# Altium PCB Flip.PcbDoc
Units mil, origin at the board's own origin, x right, y up, seen from the top; angles counter-clockwise.
Board outline 1094.88 x 2000 mil, 4 copper layers (Top Layer, GND, PWR, Bottom Layer), stack 23.756 mil thick; 95 components, 90 nets, 410 pads, 177 vias.
Unrouted connection lines stored in the file: 4.
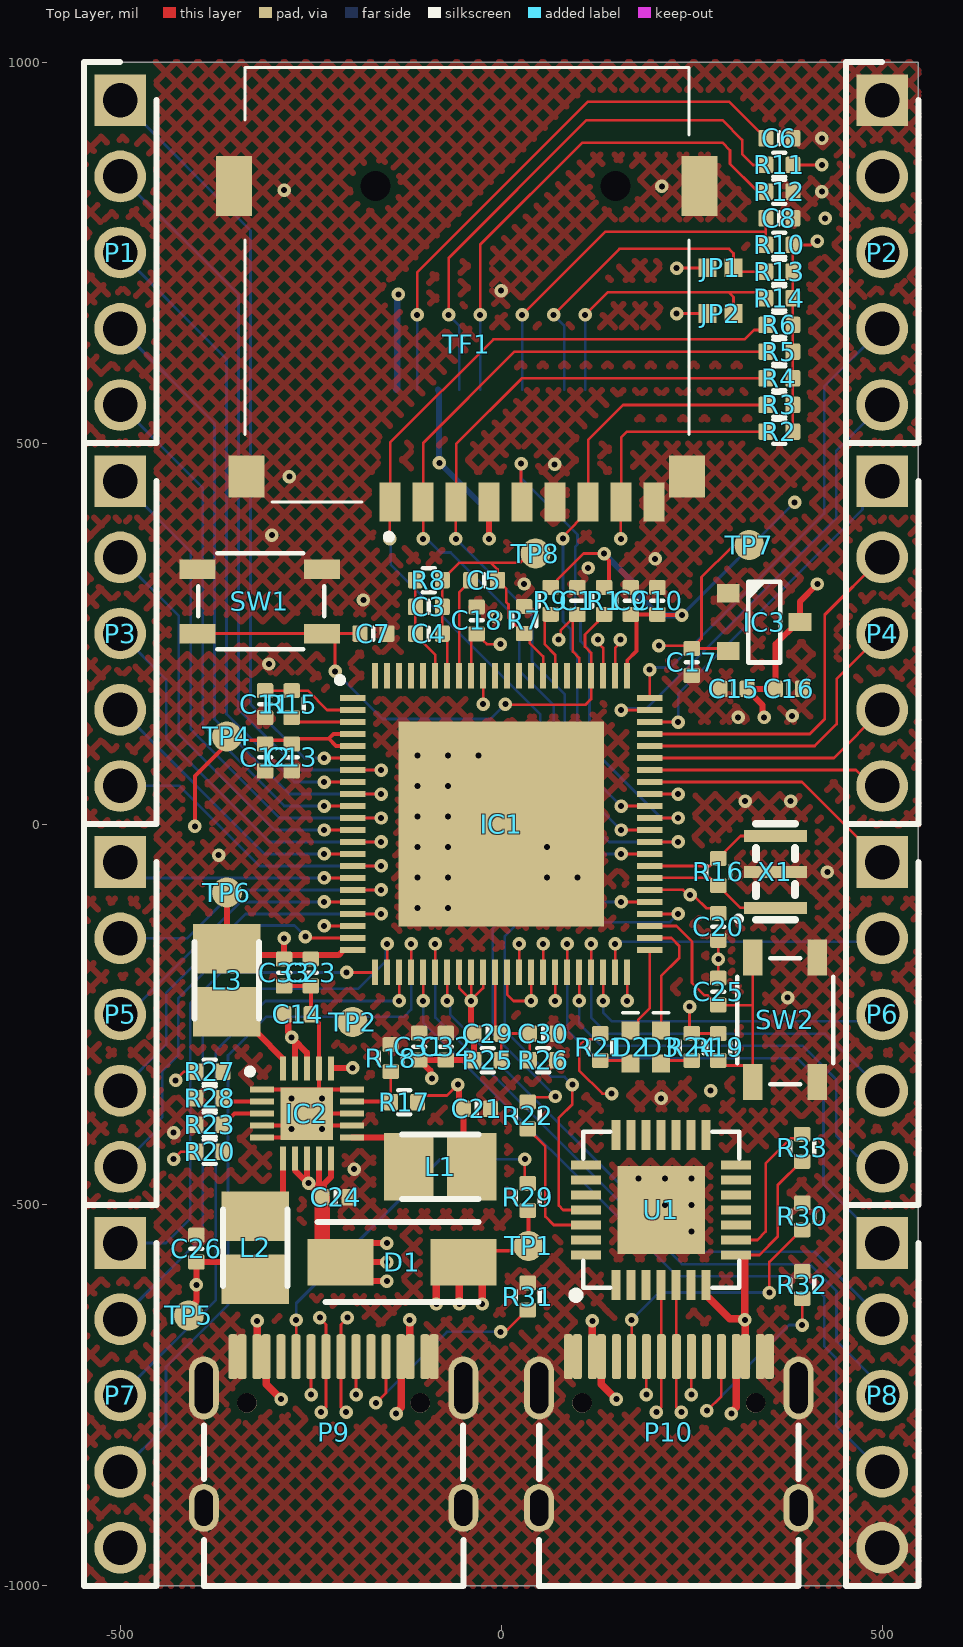
[diagram p0: Top Layer view]
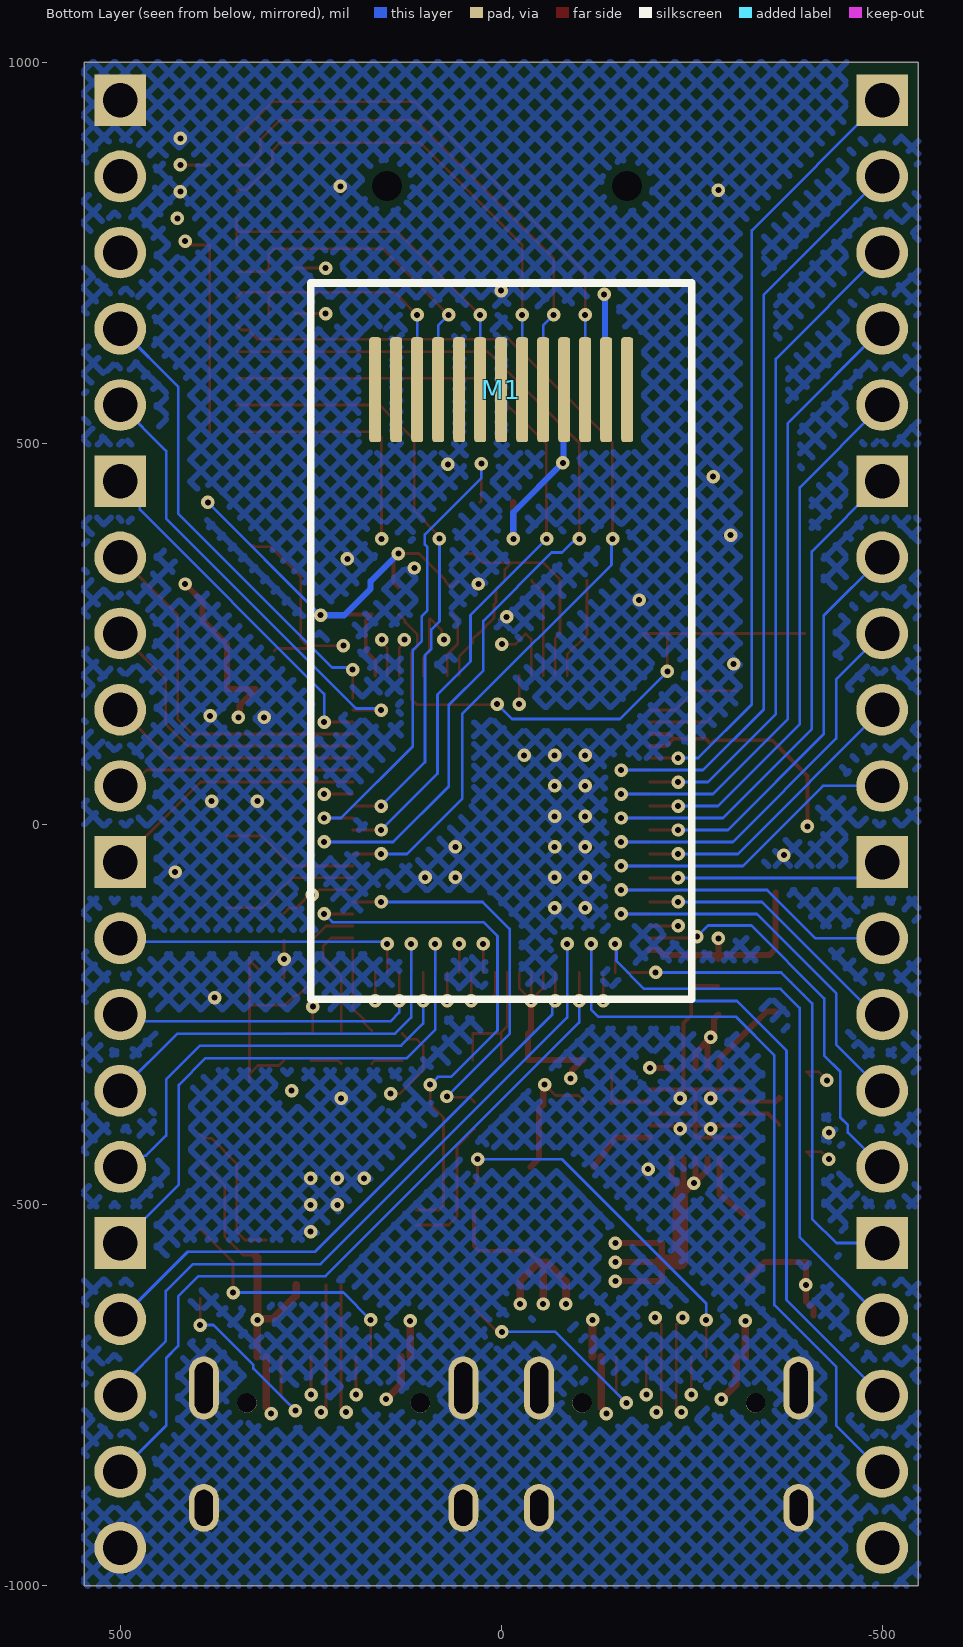
[diagram p1: Bottom Layer view, seen from below]
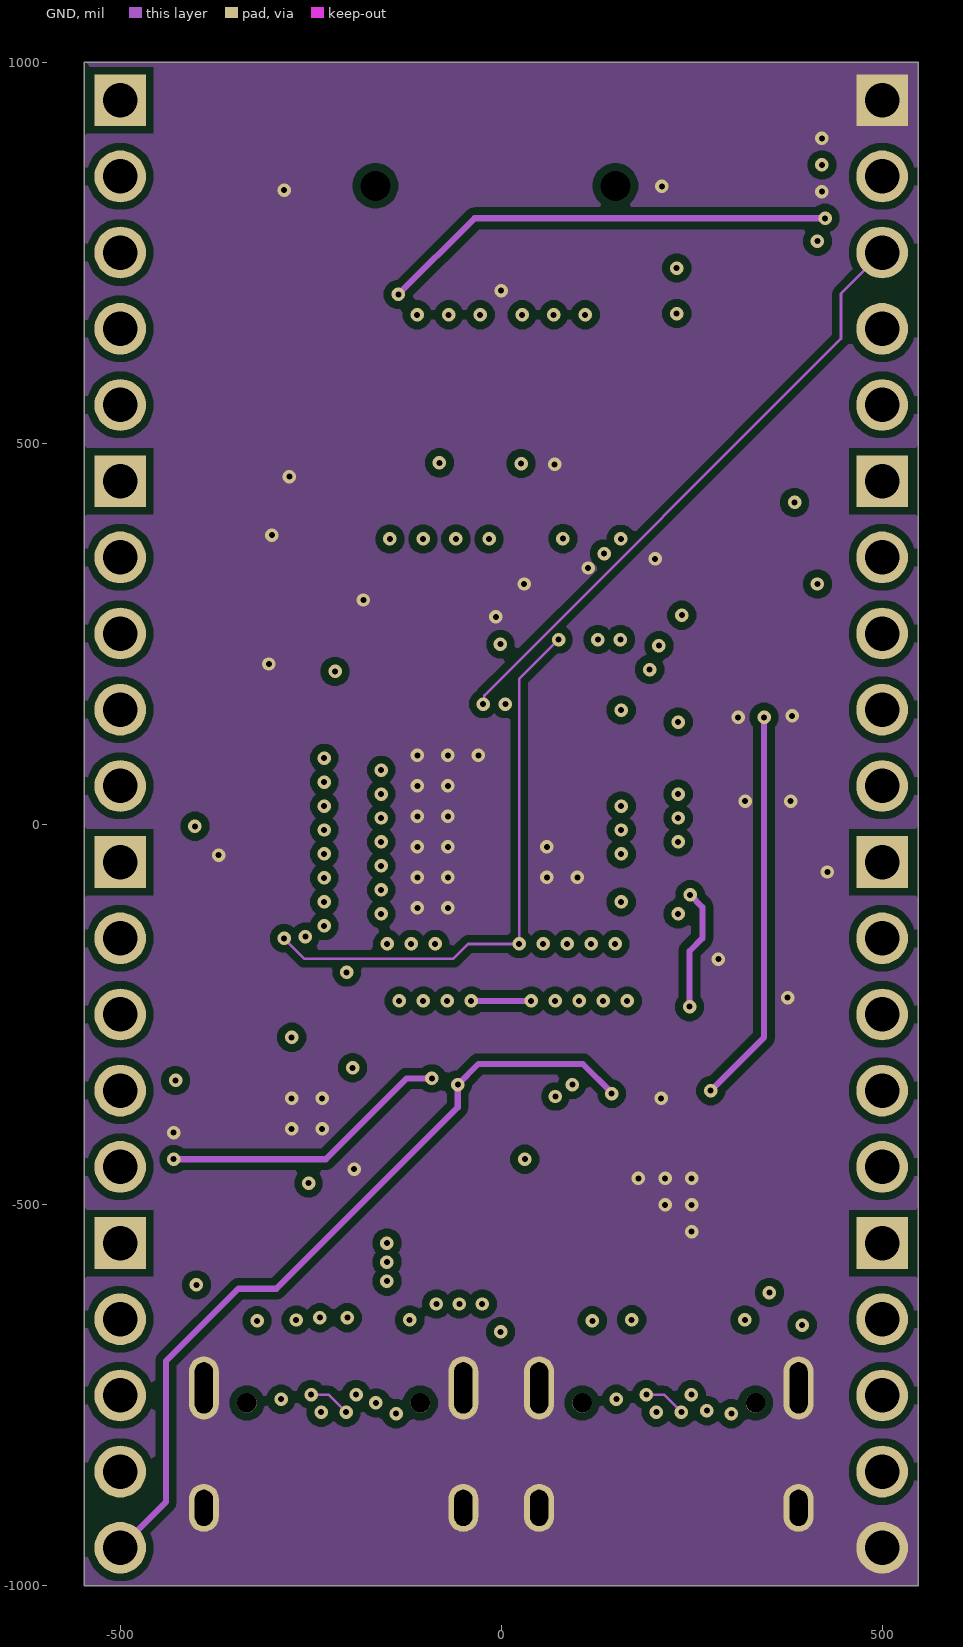
[diagram p2: GND]
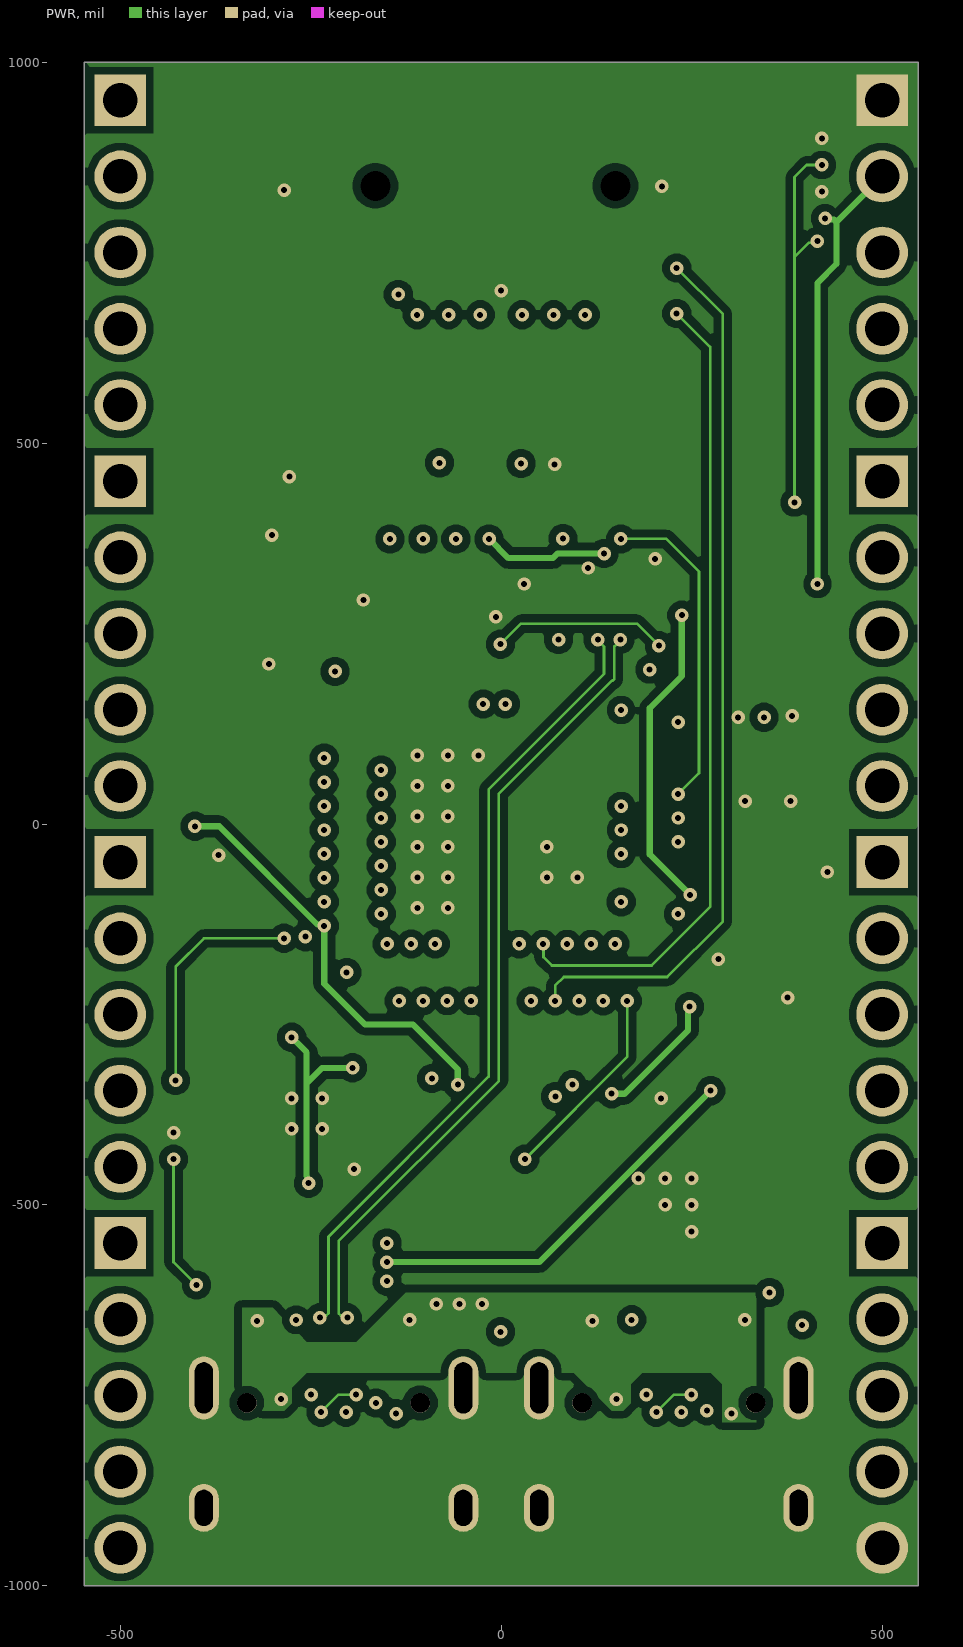
[diagram p3: PWR]
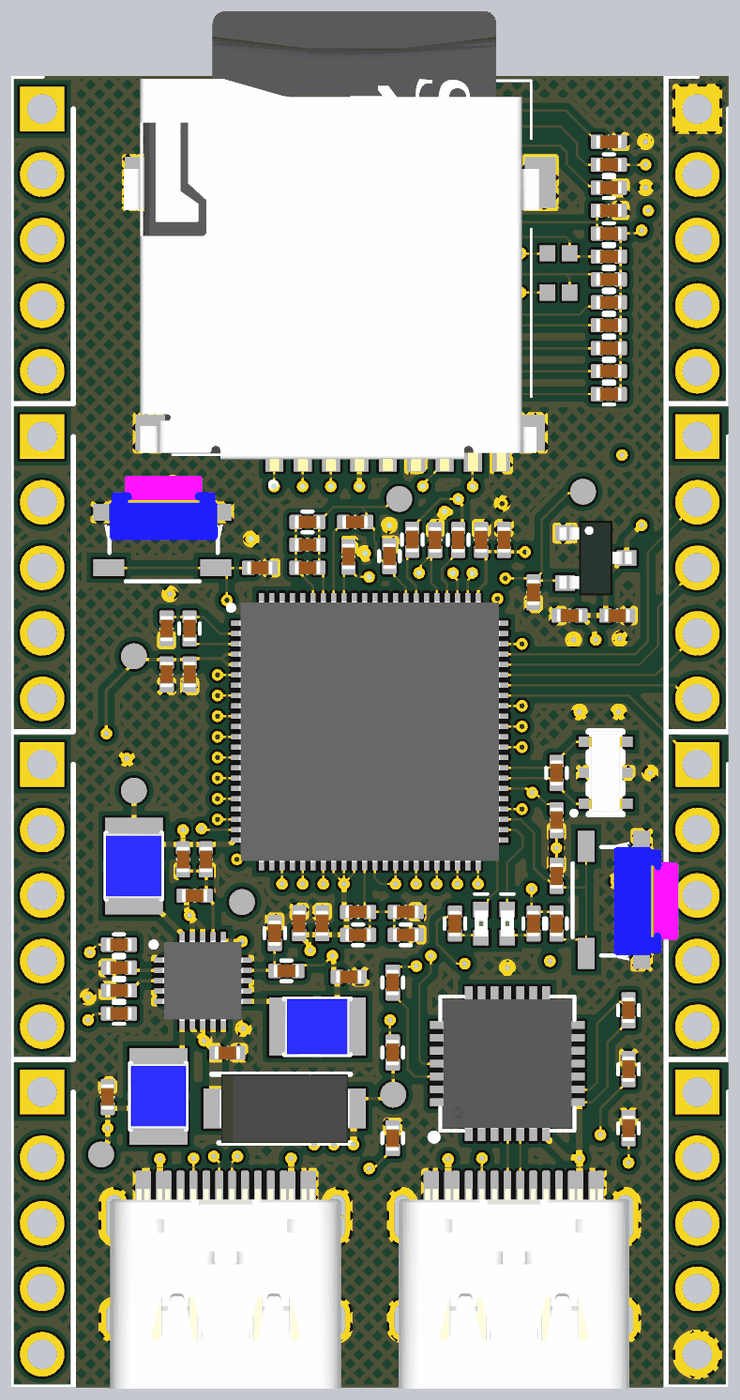
[diagram p4: 3D render of the assembled board from above, using the file's embedded part models]

## Layer stack, top to bottom
Top Solder: solder mask 0.4, Solder Resist, Dk 3.5
Top Layer: signal copper 1.4
Dielectric 2: prepreg 2.8, PP-006, Dk 4.1
GND: signal copper 1.378
Dielectric 1: dielectric 12.6, FR-4, Dk 4.8
PWR: signal copper 1.378
Dielectric 3: prepreg 2.8, PP-006, Dk 4.1
Bottom Layer: signal copper 1.4
Bottom Solder: solder mask 0.4, Solder Resist, Dk 3.5

## Board outline
-547.44,-1000 547.44,-1000 547.44,1000 -547.44,1000

## Design rules (kind name [scope] priority, off if disabled: settings)
Clearance [All] p1: gap=0 ignorepadtopadclearanceinfootprint=TRUE except(10: Arc-Fill Arc-Poly Arc-Region Track-Fill Track-Poly Track-Region SMDPad-Fill SMDPad-Poly SMDPad-Region THPad-Fill THPad-Poly THPad-Region Via-Fill Via-Poly Via-Region Fill-Fill Fill-Poly Fill-Region Poly-Poly Poly-Region Region-Region)
DiffPairsRouting [All] p1: maxlimit=10 minlimit=10 mostfreqgap=10 toplayer_minwidth=3.5 toplayer_maxwidth=15 toplayer_prefwidth=3.5 midlayer1_minwidth=3.5 midlayer1_maxwidth=15 midlayer1_prefwidth=3.5 midlayer2_minwidth=3.5 midlayer2_maxwidth=15 midlayer2_prefwidth=3.5 bottomlayer_minwidth=3.5 bottomlayer_maxwidth=15 bottomlayer_prefwidth=3.5 maxuncoupledlength=500
PolygonConnect [All] p1: connectstyle=Direct reliefconductorwidth=10 reliefentries=4 polygonreliefangle="90 Angle" airgapwidth=10
RoutingVias [All] p1: holewidth=7.87 width=17.72 viastyle="Through Hole" minholewidth=7.87 minwidth=17.72 maxholewidth=7.87 maxwidth=17.72
SolderMaskExpansion [All] p1: expansion=4 istentingtop=FALSE
Width [All] p1: maxlimit=100 minlimit=3.5 preferedwidth=3.5
29 further rules are at their usual default settings.

## Classes and differential pairs
differential pair USB: +USB_P -USB_N
differential pair USB_CP: +USB_CP_P -USB_CP_N

## Components (designator, comment, footprint, x,y, rotation, side; value= is the part's Value field where it differs from the comment)
C1 "100nF" CAP-0402 100,292.72 r270 top
C3 "100nF" CAP-0402 -95,285 r180 top
C4 "10uF" CAP-0402 -95,250 r0 top
C5 "1uF" CAP-0402 -22.28,320 r180 top
C6 "10uF" CAP-0402 365,900 r0 top
C7 "100nF" CAP-0402 -167.72,250 r180 top
C8 "10uF" CAP-0402 365,795 r0 top
C9 "100nF" CAP-0402 170,292.72 r90 top
C10 "10uF" CAP-0402 205,292.72 r270 top
C11 "1uF" CAP-0402 -310,157.28 r90 top
C12 "10uF" CAP-0402 -310,87.28 r90 top
C13 "100nF" CAP-0402 -275,87.28 r90 top
C14 "100nF" CAP-0402 -267.28,-250 r180 top
C15 "10uF" CAP-0402 305,177.28 r0 top
C16 "1uF" CAP-0402 377.72,177.28 r0 top
C17 "10uF" CAP-0402 250,212.6 r90 top
C18 "1uF" CAP-0402 -32.38,267.21 r90 top
C20 "10uF" CAP-0402 285,-135 r90 top
C21 "10uF" CAP-0402 -32,-374 r180 top
C23 "100nF" CAP-0402 -250,-195 r90 top
C24 "10uF" CAP-0402 -217.28,-490 r180 top
C25 "100nF" CAP-0402 285,-220 r270 top
C26 "10uF" CAP-0402 -400,-557.28 r270 top
C29 "100nF" CAP-0402 -17.72,-275 r0 top
C30 "100nF" CAP-0402 55,-275 r0 top
C31 "10uF" CAP-0402 -107.72,-292.28 r270 top
C32 "100nF" CAP-0402 -72.72,-292.28 r270 top
C33 "10uF" CAP-0402 -285,-195 r90 top
D1 "SS34" DO-214AC/SMA -130,-575 r0 top
D2 "RED" LED-0402 170,-292.72 r90 top
D3 "RED" LED-0402 210,-292.72 r90 top
IC1 "F1C200S" QFN88P_10X10mm 0,0 r0 top locked
IC2 "EA3036C" QFN3mmx3mm-20 -255,-380 r0 top
IC3 "XC6206P302MR-G" SOT-23-3 345,265 r180 top
JP1 "Select" 选择焊点-0402 288,730 r0 top
JP2 "Select" 选择焊点-0402 288,670 r0 top
L1 "2.2uH" L-1008 -80,-450 r0 top
L2 "2.2uH" L-1008 -322.72,-556.34 r270 top
L3 "2.2uH" L-1008 -360,-205 r90 top
M1 "OLED_12880" OLED_0.78INCH_12880 0,570 r90 bottom locked
P1 "HDR1x5" HDR1X5_2.54_180_BLANK -500,950 r270 top
P2 "HDR1x5" HDR1X5_2.54_180_BLANK 500,950 r270 top
P3 "HDR1x5" HDR1X5_2.54_180_BLANK -500,450 r270 top
P4 "HDR1x5" HDR1X5_2.54_180_BLANK 500,450 r270 top
P5 "HDR1x5" HDR1X5_2.54_180_BLANK -500,-50 r270 top
P6 "HDR1x5" HDR1X5_2.54_180_BLANK 500,-50 r270 top
P7 "HDR1x5" HDR1X5_2.54_180_BLANK -500,-550 r270 top
P8 "HDR1x5" HDR1X5_2.54_180_BLANK 500,-550 r270 top
P9 "TYPE-C-31-M-12" Type-C_16+4P -220,-798.36 r270 top locked
P10 "TYPE-C-31-M-12" Type-C_16+4P 220,-798.36 r270 top locked
R1 "10k" R-0402 135,292.72 r90 top
R2 "10k" R-0402 365,515 r0 top
R3 "10k" R-0402 365,550 r0 top
R4 "10k" R-0402 365,585 r0 top
R5 "10k" R-0402 365,620 r0 top
R6 "10k" R-0402 365,655 r0 top
R7 "0R" R-0402 30,267.72 r90 top
R8 "10k" R-0402 -95,320 r0 top
R9 "0R" R-0402 65,293 r90 top
R10 "10k" R-0402 365,760 r180 top
R11 "5.1k" R-0402 365,865 r180 top
R12 "560k" R-0402 365,830 r180 top
R13 "10k" R-0402 365,725 r180 top
R14 "10k" R-0402 365,690 r180 top
R15 "22R" R-0402 -275,157.28 r90 top
R16 "1M" R-0402 285,-62.99 r90 top
R17 "510k" R-0402 -127.28,-365 r0 top
R18 "110k" R-0402 -145,-307.28 r270 top
R19 "10k" R-0402 285,-292.72 r90 top
R20 "316k" R-0402 -382.72,-430 r180 top
R21 "5.1k" R-0402 130,-292.72 r270 top
R22 "200R" R-0402 35,-382.72 r270 top
R23 "100k" R-0402 -382.72,-395 r0 top
R24 "5.1k" R-0402 250,-292.72 r270 top
R25 "5.1k" R-0402 -17.72,-310 r0 top
R26 "5.1k" R-0402 55,-310 r0 top
R27 "100k" R-0402 -382.72,-325 r180 top
R28 "100k" R-0402 -382.72,-360 r0 top
R29 "56k" R-0402 35,-489.57 r90 top
R30 "5.1k" R-0402 395,-515 r90 top
R31 "5.1k" R-0402 35,-620.18 r90 top
R32 "5.1k" R-0402 395,-605 r90 top
R33 "10k" R-0402 395,-425 r270 top
SW1 "KEY" KEY-4P-4.2*3.4*2.5 -316.69,292.32 r180 top
SW2 "KEY" KEY-4P-4.2*3.4*2.5 372.68,-256.69 r90 top
TF1 "TF-01A" TF_1 -45,630 r90 top locked
TP1 "TestPoint" TestPoint 35.86,-553.74 r90 top
TP2 "TestPoint" TestPoint -195,-260 r90 top
TP4 "TestPoint" TestPoint -360,115 r90 top
TP5 "TestPoint" TestPoint -410,-645 r90 top
TP6 "TestPoint" TestPoint -360,-90 r90 top
TP7 "TestPoint" TestPoint 325.57,366.06 r90 top
TP8 "TestPoint" TestPoint 45,355 r90 top
U1 "CP2102" QFN28 210,-506.58 r90 top locked
X1 "24MHz" SMD3213-3P 360,-62.89 r90 top

## Footprints (in the part's own frame and the unit in brackets; to place one, negate y for a bottom-side part, rotate by r counter-clockwise, add the part's x,y. Pads: shape width x height; smd on the part's side, far side on the other; paste and mask are expansions set on the pad)
CAP-0402 [mm]
  rrect25% 0.5x0.55 smd: 1(-0.45,0) 2(0.45,0)
  silkscreen extent 0,-0.2 0,0.2, body extent -0.5,-0.25 0.5,0.25, height 0.6
DO-214AC/SMA [mm]
  rect 2.2x1.55 smd: 1(2.05,0) 2(-2.05,0)
  silkscreen extent -2.83,-1.33 2.55,1.33, body extent -2.55,-1.33 2.55,1.33, height 2.29
HDR1X5_2.54_180_BLANK [mm]
  rect 1.725x1.725 hole 1.15: 1(0,0)
  round 1.725 hole 1.15: 2(2.54,0) 3(5.08,0) 4(7.62,0) 5(10.16,0)
  silkscreen extent -1.27,-1.2 11.43,1.2
KEY-4P-4.2*3.4*2.5 [mm] "SKRPABE010"
  rect 1.2x0.65 smd: 1(-2.075,1.075) 1(2.075,1.075) 2(-2.075,-1.075) 2(2.075,-1.075)
  silkscreen extent -2.15,-1.6 2.05,1.6, body extent -2.35,-1.6 2.25,1.6, height 2.5
L-1008 [mm]
  rect 1.65x2.25 smd: 1(-1.05,0) 2(1.05,0)
  silkscreen extent -1.28,-1.07 1.28,1.07, body extent -1.28,-1.07 1.28,1.07, height 1.2
LED-0402 [mm]
  rect 0.6x0.6 smd: 1(-0.55,0) 2(0.55,0)
  silkscreen extent 1.14,-0.25 1.14,0.25, body extent -0.5,-0.25 0.5,0.25, height 0.5
OLED_0.78INCH_12880 [mm]
  rrect50% 3.5x0.4 smd: 1(0,-4.2) 2(0,-3.5) 3(0,-2.8) 4(0,-2.1) 5(0,-1.4) 6(0,-0.7) 7(0,0) 8(0,0.7) 9(0,1.4) 10(0,2.1) 11(0,2.8) 12(0,3.5) 13(0,4.2)
  silkscreen extent -20.32,-6.35 3.56,6.35, body extent -20.18,-6.25 7.54,6.25, height 1.55
QFN3mmx3mm-20 [mm]
  rect 0.8x0.2 smd: 1(-1.5,0.8) 2(-1.5,0.4) 3(-1.5,0) 4(-1.5,-0.4) 5(-1.5,-0.8) 11(1.5,-0.8) 12(1.5,-0.4) 13(1.5,0) 14(1.5,0.4) 15(1.5,0.8)
  rect 0.2x0.8 smd: 6(-0.8,-1.5) 7(-0.4,-1.5) 8(0,-1.5) 9(0.4,-1.5) 10(0.8,-1.5) 16(0.8,1.5) 17(0.4,1.5) 18(0,1.5) 19(-0.4,1.5) 20(-0.8,1.5)
  rect 1.75x1.75 smd: 21(0,0)
  silkscreen extent -2,1.3 -1.8,1.5, body extent -1.55,-1.55 1.55,1.55, height 0.8
QFN28 [mm]
  rect 1x0.3 smd: 1(-2.5,1.5) 2(-2.5,1) 3(-2.5,0.5) 4(-2.5,0) 5(-2.5,-0.5) 6(-2.5,-1) 7(-2.5,-1.5) 15(2.5,-1.5) 16(2.5,-1) 17(2.5,-0.5) 18(2.5,0) 19(2.5,0.5) 20(2.5,1) 21(2.5,1.5)
  rect 0.3x1 smd: 8(-1.5,-2.5) 9(-1,-2.5) 10(-0.5,-2.5) 11(0,-2.5) 12(0.5,-2.5) 13(1,-2.5) 14(1.5,-2.5) 22(1.5,2.5) 23(1,2.5) 24(0.5,2.5) 25(0,2.5) 26(-0.5,2.5) 27(-1,2.5) 28(-1.5,2.5)
  rect 2.921x2.921 smd paste-3.2: 29(0,0)
  silkscreen extent -2.97,-2.6 2.6,2.97, body extent -2.5,-2.5 2.5,2.5, height 1
QFN88P_10X10mm [mm]
  rect 0.85x0.2 smd: 1(-4.95,4.2) 2(-4.95,3.8) 3(-4.95,3.4) 4(-4.95,3) 5(-4.95,2.6) 6(-4.95,2.2) 7(-4.95,1.8) 8(-4.95,1.4) 9(-4.95,1) 10(-4.95,0.6) 11(-4.95,0.2) 12(-4.95,-0.2) 13(-4.95,-0.6) 14(-4.95,-1) 15(-4.95,-1.4) 16(-4.95,-1.8) 17(-4.95,-2.2) 18(-4.95,-2.6) 19(-4.95,-3) 20(-4.95,-3.4) 21(-4.95,-3.8) 22(-4.95,-4.2) 45(4.95,-4.2) 46(4.95,-3.8) 47(4.95,-3.4) 48(4.95,-3) 49(4.95,-2.6) 50(4.95,-2.2) 51(4.95,-1.8) 52(4.95,-1.4) 53(4.95,-1) 54(4.95,-0.6) 55(4.95,-0.2) 56(4.95,0.2) 57(4.95,0.6) 58(4.95,1) 59(4.95,1.4) 60(4.95,1.8) 61(4.95,2.2) 62(4.95,2.6) 63(4.95,3) 64(4.95,3.4) 65(4.95,3.8) 66(4.95,4.2)
  rect 0.2x0.85 smd: 23(-4.2,-4.95) 24(-3.8,-4.95) 25(-3.4,-4.95) 26(-3,-4.95) 27(-2.6,-4.95) 28(-2.2,-4.95) 29(-1.8,-4.95) 30(-1.4,-4.95) 31(-1,-4.95) 32(-0.6,-4.95) 33(-0.2,-4.95) 34(0.2,-4.95) 35(0.6,-4.95) 36(1,-4.95) 37(1.4,-4.95) 38(1.8,-4.95) 39(2.2,-4.95) 40(2.6,-4.95) 41(3,-4.95) 42(3.4,-4.95) 43(3.8,-4.95) 44(4.2,-4.95) 67(4.2,4.95) 68(3.8,4.95) 69(3.4,4.95) 70(3,4.95) 71(2.6,4.95) 72(2.2,4.95) 73(1.8,4.95) 74(1.4,4.95) 75(1,4.95) 76(0.6,4.95) 77(0.2,4.95) 78(-0.2,4.95) 79(-0.6,4.95) 80(-1,4.95) 81(-1.4,4.95) 82(-1.8,4.95) 83(-2.2,4.95) 84(-2.6,4.95) 85(-3,4.95) 86(-3.4,4.95) 87(-3.8,4.95) 88(-4.2,4.95)
  rect 6.84x6.84 smd: 89(0,0)
  silkscreen extent -5.47,4.7 -5.28,4.9, body extent -5.05,-5.05 5.05,5.05, height 0.9
R-0402 [mm]
  rrect25% 0.5x0.55 smd: 1(-0.45,0) 2(0.45,0)
  silkscreen extent -0.2,-0.4 0.2,0.4, body extent -0.5,-0.25 0.5,0.25, height 0.6
SMD3213-3P [mm]
  rect 0.4x2.1 smd: 1(-1.2,0) 2(0,0) 3(1.2,0)
  silkscreen extent -1.61,-0.65 1.6,1.27, body extent -1.6,-0.65 1.6,0.65, height 0.7
SOT-23-3 [mil]
  rect 30x24 smd: 1(47,-38) 2(47,38) 3(-47,0)
  silkscreen extent -21,-53 21,53, body extent -55,-57 55,57, height 51
TestPoint [mm]
  round 1 smd: 1(0,0)
TF_1 [mm]
  rect 1.3x0.7 smd: 1(-5.275,2.56) 2(-5.275,1.46) 3(-5.275,0.36) 4(-5.275,-0.74) 5(-5.275,-1.84) 6(-5.275,-2.94) 7(-5.275,-4.04) 8(-5.275,-5.14) 9(-5.275,-6.24)
  rect 1.4x1.2 smd: 10(-4.425,-7.34) 13(-4.425,7.34)
  rect 2x1.2 smd: 11(5.275,-7.76) 12(5.275,7.76)
  round 0.5 hole 1 unplated: 14(5.275,-4.95) 15(5.275,3.05)
  silkscreen extent -6.53,-7.4 9.23,7.4, body extent -5.9,-7.7 11.92,8.4, height 2.05
Type-C_16+4P [mm]
  round 0.65 hole 0.65: 0(-0.98,2.89) 0(-0.98,-2.89)
  oval 1.6x1 hole 0.6 slot 1.2 at 0 deg: 1(2.52,4.325) 2(2.52,-4.325)
  oval 2.1x1 hole 0.6 slot 1.7 at 0 deg: 3(-1.48,-4.325) 4(-1.48,4.325)
  rrect50% 1.5x0.3 smd: A1(-2.52,-3.35) A4(-2.52,-2.55) A5(-2.52,-1.25) A6(-2.52,-0.25) A7(-2.52,0.25) A8(-2.52,1.25) A9(-2.52,2.55) A12(-2.52,3.35) B1(-2.52,3.05) B4(-2.52,2.25) B5(-2.52,1.75) B6(-2.52,0.75) B7(-2.52,-0.75) B8(-2.52,-1.75) B9(-2.52,-2.25) B12(-2.52,-3.05)
  silkscreen extent -0.22,-4.33 5.12,4.33, body extent -2.57,-4.48 5.18,4.48, height 3.26
选择焊点-0402 [mm]
  rect 0.6x0.62 smd: 1(-0.432,0) 2(0.432,0)

## Part data
C1 C3 C4 C5 C6 C7 C8 C9 C10 C11 C12 C13 C14 C15 C16 C17 C18 C20 C21 C23 C24 C25 C26 C29 C30 C31 C32 C33: library part CAP, "贴片电容", Package=0402, SuppliersPartNumber=C52923, ComponentLink1Description=供应商链接, ComponentLink1URL=http://www.szlcsc.com/product/details_53938.html, Supplier=LC
D1: library part DIODE, "肖特基二极管", Package=SMA(DO-214AC), SuppliersPartNumber=C22452, ComponentLink1Description=供应商链接, ComponentLink1URL=http://www.szlcsc.com/product/details_23178.html, Supplier=LC
D2 D3: library part LED, "发光二极管", Package=0603, SuppliersPartNumber=C2290, ComponentLink1Description=供应商链接, ComponentLink1URL=http://www.szlcsc.com/product/details_2663.html, Supplier=LC
IC1: library part F1C100S/F1C200S, "SOC", Manufacturer_Name="Allwinner Technology", Datasheet Link=https://linux-sunxi.org/images/1/11/Allwinner_F1C200s_Datasheet_V1.0.pdf, Height=0.9mm, Manufacturer_Part_Number=F1C200S
IC2: "EA3036 is a 3CH power management IC for applications powered by one Li-Ion battery or a DC 5V adapter."
IC3: library part XC6206, "LDO", Manufacturer_Name=Torex, Manufacturer_Part_Number=XC6206P122MR-G, Mouser Part Number=865-XC6206P122MR-G, Datasheet Link=https://www.torexsemi.com/file/xc6206/XC6206.pdf, Height=1.3mm, Mouser Price/Stock=https://www.mouser.co.uk/ProductDetail/Torex-Semiconductor/XC6206P122MR-G?qs=AsjdqWjXhJ%2F35%2FU%2FZk2JYg%3D%3D
JP1 JP2: "选择焊点"
L1 L2 L3: library part INDUCTOR, "SRN2512-2R2M", Package=0402, SuppliersPartNumber=C32041, ComponentLink1Description=供应商链接, ComponentLink1URL=http://www.szlcsc.com/product/details_33003.html, Supplier=LC
M1: "OLED屏"
P1 P2 P3 P4 P5 P6 P7 P8: library part HDR1x5_2.54, "Header", Manufacturer_Name="FCI Electronics", Manufacturer_Part_Number=10129378-905001BLF, Mouser Part Number=649-1012937890501BLF, Datasheet Link=https://cdn.amphenol-icc.com/media/wysiwyg/files/drawing/10129378.pdf, Height=8.58mm, Mouser Price/Stock=https://www.mouser.com/Search/Refine.aspx?Keyword=649-1012937890501BLF
P9 P10: library part USB_Type-C_16+4P, "USB Type-C 座子"
R1 R2 R3 R4 R5 R6 R7 R8 R9 R10 R11 R12 R13 R14 R15 R16 R19 R21 R22 R24 R25 R26 R29 R30 R31 R32 R33: library part RES, "贴片电阻", Package=0805, SuppliersPartNumber=C17798, Supplier=LC
R17 R18: library part RES, "RC0402FR-07510KL", Package=0805, SuppliersPartNumber=C17798, Supplier=LC
R20: library part RES, "RC0402FR-07316KL", Package=0805, SuppliersPartNumber=C17798, Supplier=LC
R23 R27 R28: library part RES, "RC0402FR-07100KL", Package=0805, SuppliersPartNumber=C17798, Supplier=LC
SW1 SW2: "按键开关"
TF1: library part TF卡座_8脚自弹, "与TF-01A封装相似则可替换"
TP1 TP2 TP4 TP5 TP6 TP7 TP8: "测试点"
U1: "CP2102-GMR"
X1: library part XTAL, "村田无源晶振"

## Via types
v1: diameter 17.72, hole 7.87, Top Layer to Bottom Layer, 177 vias

## Nets (pads, with @x,y where several pads share a name; then routed paths per layer and width w, separated by ;. In a path a pad name is that pad's centre, name@x,y a point inside that pad or via, vN(x,y) a via of type N, cw(c..) or ccw(c..) an arc to the next point about the centre after c; other vN are vias at no path point)
ADC0: IC1.79 P2.3 | length 846.8
  Top Layer w3.5: v1(-23.62,157.48) IC1.79
  GND w3.5: v1(-23.62,157.48) -22.09,159.01 -22.09,168.91 446,637 446,696 P2.3
AGND: C3.1 C4.2 C5.1 IC1.74 IC1.82 R7.1 R8.2 TP8.1 | length 442.4
  Top Layer w3.5: IC1.82 IC1.82 -70.93,243.64 C4.2 C3.1 R8.2 -77.28,320.73 -54.93,343.08 -13.76,343.08 ; TP8.1 36.93,355 25.01,343.08 -13.76,343.08 ; IC1.74 55.12,219.96 37.36,237.71 37.36,242.64 R7.1 29.4,250 20.92,258.48 20.92,259.08 9.5,270.5 9.5,288.22 6.8,290.92 6.8,308.63 4.51,310.92 3.91,310.92 -4.57,319.4 C5.1 -4.71,320.14 -4.71,334.03 -13.76,343.08
AVCC_3V0: C17.2 C18.1 IC1.80 IC3.2 TP7.1 | length 598.5
  Top Layer w3.5: IC1.80 -39.31,194.94 -39.31,242.56 C18.1 -31.78,249.49 -23.3,241.02 -23.3,240.42 -18.88,236 v1(-1,236) ; v1(207,234) 246.31,234 C17.2 C17.2@250.6,230.31 ; IC3.2 294.69,230.31 C17.2@250.6,230.31 ; TP7.1 323.2,363.68 302.68,363.68 263,324 263,243.31 258.64,238.95 258.64,238.35 C17.2@250.6,230.31
  PWR w3.5: v1@-0.82,236.18 26,263 178,263 v1(207,234)
GND: C1.1 C6.2 C7.1 C8.2 C9.2 C10.1 C11.1 C12.1 C13.1 C14.1 C15.1 C16.2 C17.1 C18.2 C20.1 C21.1 C23.1 C24.1 C25.1 C26.1 C30.2 C31.1 C32.1 C33.1 IC1.89 IC2.1 IC2.4 IC2.5 IC2.12 IC2.13 IC2.15 IC2.17 IC2.21 IC3.1 M1.7 M1.9 M1.12 P2.1 P8.5 P9.1 P9.2 P9.3 P9.4 P9.A1 P9.A12 P9.B1 P9.B12 P10.1 P10.2 P10.3 P10.4 P10.A1 P10.A12 P10.B1 P10.B12 R7.2 R12.1 R18.1 R23.1 R26.2 R28.1 R30.2 R31.2 R32.2 SW1.2 SW2.2 TF1.6 TF1.9 TF1.10 TF1.11 TF1.12 TF1.13 U1.3 U1.29 X1.2 | length 679.2
  Top Layer w3.5: C23.1 -249.57,-213.15 C14.1 ; C25.1 C20.1
  Top Layer w5: IC2.5 -255,-411.5 IC2.21@-255,-395.75 ; IC2.4 IC2.21@-255,-395.75 ; IC2.1 IC2.21@-255,-348.5 ; C33.1 C23.1 ; C23.1@-249.57,-213.15 C14.1 -249.57,-250.98 -239.25,-261.3 IC2.17 -239.25,-348.05 IC2.21@-239.7,-348.5 ; IC2.12 IC2.21@-255,-395.75 ; IC2.13 IC2.21 ; IC2.15 IC2.21@-239.7,-348.5 ; IC2.21@-255,-395.75 IC2.21 ; IC2.21 IC2.21@-255,-348.5 ; IC2.21@-255,-348.5 IC2.21@-239.7,-348.5
  other v1: 250,-535 215,-500 250,-500 180,-465 215,-465 250,-465 -193,-453 -430,-405 -275,-400 -235,-400 -275,-360 -235,-360 210,-360 376,-228 285,-177.5 -110,-110 -70,-110 -110,-70 -70,-70 60,-70 100,-70 428,-63 -371,-41 -110,-30 -70,-30 60,-30 -110,10 -70,10 320,30 380,30 -110,50 -70,50 -110,90 -70,90 -30,90 311,140 382,142 -305,210 -7,272 -181,294 30,315 114,336 202,348 -301,379 -278,456 70,472 0,700 421,830 -285,832 211,837 421,900
KEY_USR: C25.2 IC1.47 R19.1 SW2.1 | length 442
  Top Layer w3.5: IC1.47 229.93,-133.86 250.41,-154.33 250.41,-208.41 266.88,-224.88 270.79,-224.88 283.63,-237.72 C25.2 330.07,-237.72 330.35,-238 ; R19.1 291.61,-317.04 319.31,-317.04 SW2.1@330.35,-328.09 ; SW2.1@319.31,-190 SW2.1@330.35,-178.95 ; SW2.1@330.35,-338.39 SW2.1@330.35,-328.09 ; SW2.1@330.35,-175 SW2.1@330.35,-178.95 ; SW2.1@330.35,-328.09 330.35,-238 ; 330.35,-238 SW2.1@330.35,-178.95
LED_SYS: D3.2 IC1.46 | length 163.9
  Top Layer w3.5: IC1.46 223.32,-149.61 233.52,-159.8 233.52,-176.21 210,-199.73 D3.2
LED_USR: D2.2 IC1.45 | length 116
  Top Layer w3.5: D2.2 180.06,-261 180.06,-256.73 194.88,-241.91 IC1.45
NetC3_2: C3.2 C4.1 IC1.83 R8.1 | length 135.7
  Top Layer w3.5: C4.1@-113.07,248.66 -86.66,222.25 IC1.83@-86.66,194.92 ; C4.1@-112.72,249.02 C4.1 C3.2 R8.1
NetC5_2: C5.2 IC1.81 | length 131.4
  Top Layer w3.5: IC1.81 -55.12,303.9 -40,319.02 C5.2
NetC6_1: C6.1 M1.3 | length 724.4
  Top Layer w3.5: v1(-110.24,668.34) -110.24,723.7 114.07,948.01 299.28,948.01 338.65,908.64 339.25,908.64 347.28,900.6 C6.1
  Bottom Layer w3.5: M1.3 v1(-110.24,668.34)
NetC7_2: C7.2 IC1.70 R1.1 SW1.1 | length 772.8
  Top Layer w3.5: SW1.1@-398.39,250 -235,250 SW1.1@-218.12,250 ; v1(-218.12,200.28) SW1.1@-218.12,250 ; C7.2@-193.47,241.36 -185.43,249.4 C7.2 SW1.1@-218.12,250 ; v1@5.47,156.53 110.6,156.53 118.11,164.03 IC1.70 118.11,224.69 110,232.8 110,248.64 126.36,265 126.36,266.96 134.4,275 R1.1@134.76,275
  Bottom Layer w3.5: v1(-218.12,200.28) -155.66,137.82 -14.19,137.82 v1(5.47,157.48)
NetC8_1: C8.1 M1.8 R10.2 | length 498.3
  Top Layer w3.5: v1(27.56,668.34) 136.73,777.51 347.28,777.51 ; R10.2 347.28,775.21 347.28,777.51 ; C8.1 347.28,777.51
  Bottom Layer w3.5: M1.8 v1(27.56,668.34)
NetC11_2: C11.2 IC1.2 R15.2 | length 125.6
  Top Layer w3.5: C11.2 -253.82,175 -228.44,149.63 IC1.2
NetC29_2: C29.2 C30.1 IC1.33 R25.2 R26.1 | length 190.7
  Top Layer w3.5: IC1.33 -7.87,-265.76 0,-273.63 C29.2 ; R25.2 C29.2 ; R26.1 C30.1 C29.2
NetD2_A: D2.1 R21.2 | length 41.6
  Top Layer w3.5: R21.2 166.06,-310.43 D2.1
NetD3_A: D3.1 R24.2 | length 41.6
  Top Layer w3.5: D3.1 213.94,-310.43 R24.2
NetIC1_3: IC1.3 R15.1 | length 82.5
  Top Layer w3.5: R15.1 -269.33,133.9 IC1.3 IC1.3
NetIC1_51: IC1.51 R16.1 X1.1 | length 182.2
  Top Layer w3.5: IC1.51@194.88,-70.66 273.87,-70.66 283.72,-80.51 285,-80.51 285.6,-80.51 293.64,-88.54 293.64,-89.73 314.04,-110.14 X1.1
NetIC1_52: IC1.52 R16.2 X1.3 | length 182.8
  Top Layer w3.5: IC1.52 273.87,-55.12 283.72,-45.28 R16.2@285.6,-45.28 ; R16.2 R16.2@285.6,-45.28 ; X1.3 314.04,-15.65 293.64,-36.05 293.64,-37.24 R16.2@285.6,-45.28
NetIC1_73: IC1.73 R9.1 | length 89.5
  Top Layer w3.5: R9.1 57,267.28 57,236 70.87,222.13 IC1.73
NetIC2_2: IC2.2 R27.1 R28.2 | length 52.3
  Top Layer w5: R28.2@-359.16,-364.25 IC2.2
  Top Layer w8: R28.2 R28.2@-359.16,-364.25
NetIC2_3: IC2.3 R20.1 R23.2 | length 57.7
  Top Layer w5: R23.2 -365,-394.02 -357.66,-386.67 -356.67,-386.67 -350,-380 IC2.3
NetIC2_6: IC2.6 L2.1 | length 93.5
  Top Layer w8: L2.1 -286.5,-486.52 IC2.6
NetIC2_11: IC2.11 L1.1 | length 94
  Top Layer w8: IC2.11 -149.82,-411.5 L1.1
NetIC2_14: IC2.14 R17.1 R18.2 | length 91
  Top Layer w3.5: R17.1 R18.2
  Top Layer w5: IC2.14 R17.1@-150.84,-364.25
  Top Layer w8: R17.1@-150.84,-364.25 R17.1
NetIC2_20: IC2.20 L3.1 | length 112
  Top Layer w8: L3.1 -348.19,-246.34 -319.71,-274.82 -286.5,-308.03 IC2.20
NetJP1_2: JP1.2 M1.10 R13.2 | length 441.7
  Top Layer w3.5: v1(68.9,668.34) 155.37,754.82 299.1,754.82 305,748.92 JP1.2 310,725 R13.2
  Bottom Layer w3.5: v1(68.9,668.34) 82.68,654.56 M1.10
NetJP2_2: JP2.2 M1.11 R14.2 | length 382.2
  Top Layer w3.5: v1(110.24,668.34) 139.92,698.03 298.45,698.03 ; JP2.2 305,691.48 298.45,698.03 ; R14.2 347.28,690.69 339.94,698.03 298.45,698.03
  Bottom Layer w3.5: M1.11 v1(110.24,668.34)
NetM1_5: M1.5 R11.2 | length 704.7
  Top Layer w3.5: v1(-68.9,668.34) -68.9,742.56 112.25,923.7 290.39,923.7 316.29,897.81 316.29,879.27 330.56,865 R11.2
  Bottom Layer w3.5: v1(-68.9,668.34) -55.12,654.56 M1.5
NetM1_6: M1.6 R12.2 | length 657.8
  Top Layer w3.5: v1(-27.56,668.34) -27.56,760.28 106.47,894.31 290.31,894.31 300.41,884.21 300.41,866.29 334.24,832.46 344.82,832.46 R12.2
  Bottom Layer w3.5: M1.6 v1(-27.56,668.34)
NetP9_B5: P9.B5 R31.1 | length 316.1
  Top Layer w3.5: v1(-164.41,-759.84) -151.1,-746.54 P9.B5 ; v1(-0.84,-666.46) 1.88,-663.74 8.17,-663.74 34.02,-637.9 R31.1
  Bottom Layer w3.5: v1(-164.41,-759.84) -71.03,-666.46 v1(-0.84,-666.46)
NetP10_A5: P10.A5 R30.1 | length 346.9
  Top Layer w3.5: P10.A5 170.37,-698.73 170.37,-696.52 171.25,-697.4 v1(171.25,-650.8) ; v1(352,-615) 352,-574.74 394.03,-532.72 R30.1
  Bottom Layer w3.5: v1(171.25,-650.8) 207.05,-615 v1(352,-615)
NetP10_B5: P10.B5 R32.1 | length 287.8
  Top Layer w3.5: v1(270,-770) 288.9,-751.1 P10.B5 ; v1(395,-657.64) R32.1
  Bottom Layer w3.5: v1(270,-770) 325.26,-714.74 325.26,-710.17 377.8,-657.64 v1(395,-657.64)
NetR22_2: R22.2 U1.26 | length 182.8
  Top Layer w3.5: R22.2 35.6,-400.43 44.08,-408.91 44.08,-409.51 57.9,-423.34 57.9,-515.19 68.98,-526.26 U1.26
NetR33_1: R33.1 U1.9 | length 196.5
  Top Layer w3.5: U1.9 336.25,-545.95 347.14,-535.05 347.14,-445.52 380.27,-412.39 389.89,-412.39 R33.1
PA0/TOUCH_X1: IC1.66 P2.4 | length 625.3
  Top Layer w3.5: IC1.66 v1(194.88,202.76)
  Bottom Layer w3.5: v1(194.88,202.76) 197.6,205.48 221.96,205.48 423.97,407.49 423.97,573.97 P2.4
PA1/TOUCH_X2: IC1.65 P2.5 | length 597.9
  Top Layer w3.5: v1(157.48,149.61) IC1.65
  Bottom Layer w3.5: v1(157.48,149.61) 159.53,151.65 190.65,151.65 439.7,400.7 439.7,489.7 P2.5
PA2/TOUCH_Y1: IC1.64 P4.1 | length 464.4
  Top Layer w3.5: IC1.64 v1(232.28,133.86)
  Bottom Layer w3.5: v1(232.28,133.86) 232.28,170.84 474.28,412.84 474.28,424.28 P4.1
PA3/TOUCH_Y2: IC1.63 P4.2 | length 481.3
  Top Layer w3.5: IC1.63 404.96,118.11 424.65,137.79 424.65,274.65 P4.2
PC0/SPI0_CLK: IC1.59 P6.1 | length 348.7
  Top Layer w3.5: IC1.59 394.88,55.12 P6.1
PC1/SPI0_CS: IC1.60 P4.5 | length 313.8
  Top Layer w3.5: IC1.60 465.42,70.87 486.29,50 P4.5
PC2/SPI0_MISO: IC1.61 P4.4 | length 331.4
  Top Layer w3.5: IC1.61 436.61,86.61 P4.4
PC3/SPI0_MOSI: IC1.62 P4.3 | length 400.9
  Top Layer w3.5: IC1.62 411.46,102.36 440.38,131.28 440.38,190.38 P4.3
PD0: IC1.6 P1.1 | length 1027
  Top Layer w3.5: v1(-232.28,86.61) IC1.6
  Bottom Layer w3.5: P1.1 -328.99,778.99 -328.99,157.16 -258.45,86.61 v1(-232.28,86.61)
PD1: IC1.7 P1.2 | length 1021.4
  Top Layer w3.5: IC1.7 v1(-157.48,70.87)
  Bottom Layer w3.5: P1.2 -344.73,694.73 -344.73,150.62 -264.97,70.87 v1(-157.48,70.87)
PD2: IC1.8 P1.3 | length 866.1
  Top Layer w3.5: v1(-232.28,55.12) IC1.8
  Bottom Layer w3.5: P1.3 -360.45,610.45 -360.45,144.08 -271.49,55.12 v1(-232.28,55.12)
PD3/UART1_RX: IC1.9 P1.4 | length 860.5
  Top Layer w3.5: IC1.9 v1(-157.48,39.37)
  Bottom Layer w3.5: P1.4 -376.19,526.19 -376.19,137.54 -278.01,39.37 v1(-157.48,39.37)
PD4/UART1_TX: IC1.10 P1.5 | length 705.3
  Top Layer w3.5: v1(-232.28,23.62) IC1.10
  Bottom Layer w3.5: P1.5 -391.91,441.91 -391.91,131 -284.54,23.62 v1(-232.28,23.62)
PD5: IC1.11 P3.1 | length 699.7
  Top Layer w3.5: IC1.11 v1(-157.48,7.87)
  Bottom Layer w3.5: P3.1 -407.65,357.64 -407.65,124.46 -291.06,7.87 v1(-157.48,7.87)
PD6: IC1.12 P3.2 | length 544.4
  Top Layer w3.5: v1(-232.28,-7.87) IC1.12
  Bottom Layer w3.5: P3.2 -423.38,273.38 -423.38,117.92 -297.58,-7.87 v1(-232.28,-7.87)
PD7: IC1.13 P3.3 | length 538.8
  Top Layer w3.5: IC1.13 v1(-157.48,-23.62)
  Bottom Layer w3.5: P3.3 -439.69,189.7 -439.69,111.97 -304.11,-23.62 v1(-157.48,-23.62)
PD8: IC1.14 P3.4 | length 383.6
  Top Layer w3.5: v1(-232.28,-39.37) IC1.14
  Bottom Layer w3.5: P3.4 -310.63,-39.37 v1(-232.28,-39.37)
PD9: IC1.15 P3.5 | length 423.5
  Top Layer w3.5: IC1.15 v1(-157.48,-55.12)
  Bottom Layer w3.5: P3.5 -422.27,50 -317.15,-55.12 v1(-157.48,-55.12)
PD10: IC1.16 P5.1 | length 313.8
  Top Layer w3.5: v1(-232.28,-70.87) IC1.16
  Bottom Layer w3.5: P5.1 -479.13,-70.87 v1(-232.28,-70.87)
PD11: IC1.17 P5.2 | length 406.2
  Top Layer w3.5: IC1.17 v1(-157.48,-86.61)
  Bottom Layer w3.5: P5.2 -412.45,-150 -349.06,-86.61 v1(-157.48,-86.61)
PD12: IC1.18 P5.3 | length 366.3
  Top Layer w3.5: v1(-232.28,-102.36) IC1.18
  Bottom Layer w3.5: P5.3 -490.04,-250 -342.4,-102.36 v1(-232.28,-102.36)
PD13/UART2_TX: IC1.19 P5.4 | length 515.6
  Top Layer w3.5: IC1.19 v1(-157.48,-118.11)
  Bottom Layer w3.5: P5.4 -439.65,-289.65 -439.65,-222.07 -335.7,-118.11 v1(-157.48,-118.11)
PD14/UART2_RX: IC1.21 P5.5 | length 528.1
  Top Layer w3.5: v1(-256.9,-147.92) -255.21,-149.61 IC1.21
  Bottom Layer w3.5: P5.5 -455,-405 -455,-395 -445,-385 -445,-325 -423.92,-303.92 -423.92,-228.81 -328.43,-133.31 -271.51,-133.31 v1(-256.9,-147.92)
PD15/I2C2_CLK: IC1.23 P7.1 | length 647.3
  Top Layer w3.5: v1(-202.76,-194.88) IC1.23
  Bottom Layer w3.5: P7.1 -440,-550 -408.19,-518.19 -408.19,-235.56 -396.99,-224.36 -380.53,-207.9 -367.51,-194.88 v1(-202.76,-194.88)
PD16/I2C2_SDA: IC1.24 P7.2 | length 779.8
  Top Layer w3.5: IC1.24 v1(-149.61,-157.48)
  Bottom Layer w3.5: P7.2 -391.77,-541.77 -391.77,-241.46 -366.57,-216.26 -187.69,-216.26 -151.34,-179.91 -151.34,-159.21 v1(-149.61,-157.48)
PD17: IC1.25 P7.3 | length 809.5
  Top Layer w3.5: v1(-133.86,-232.28) IC1.25
  Bottom Layer w3.5: P7.3 -374.53,-624.53 -374.53,-297.53 -309.28,-232.28 v1(-133.86,-232.28)
PD18: IC1.26 P7.4 | length 993.8
  Top Layer w3.5: IC1.26 v1(-118.11,-157.48)
  Bottom Layer w3.5: P7.4 -439.84,-789.84 -439.84,-712.51 -358.57,-631.25 -358.57,-303.57 -307.86,-252.86 -127.27,-252.86 ; -127.21,-252.8 -118.11,-243.7 v1(-118.11,-157.48)
PD19: IC1.27 P8.4 | length 1002.4
  Top Layer w3.5: v1(-102.36,-232.28) IC1.27
  Bottom Layer w3.5: v1(-102.36,-232.28) -102.36,-260.58 230.58,-593.52 397.45,-593.52 423.92,-620 423.92,-685.16 439.61,-700.85 439.61,-789.61 P8.4
PD20: IC1.28 P8.3 | length 971
  Top Layer w3.5: IC1.28 v1(-86.61,-157.48)
  Bottom Layer w3.5: v1(-86.61,-157.48) -86.61,-233.9 -86.5,-234.01 -86.5,-253.91 237.23,-577.64 404.68,-577.64 440.06,-613.03 440.06,-678.78 500,-738.72 P8.3
PD21: IC1.29 P8.2 | length 789.4
  Top Layer w3.5: v1(-70.87,-232.28) IC1.29
  Bottom Layer w3.5: v1(-70.87,-232.28) -68.15,-235 -68.15,-238.85 -67.01,-239.98 -67.01,-250.04 244.36,-561.41 411.41,-561.41 P8.2
PE6/PWM1: IC1.43 P6.2 | length 390.9
  Top Layer w3.5: IC1.43 v1(149.61,-157.48)
  Bottom Layer w3.5: v1(149.61,-157.48) 152.33,-154.76 495.24,-154.76 P6.2
PE7/SPI1_CS: IC1.42 P6.3 | length 427.2
  Top Layer w3.5: v1(133.86,-232.28) IC1.42
  Bottom Layer w3.5: v1(133.86,-232.28) 133.86,-247.46 145.4,-259.01 490.99,-259.01 P6.3
PE8/SPI1_MOSI: IC1.41 P6.4 | length 555.7
  Top Layer w3.5: IC1.41 v1(118.11,-157.48)
  Bottom Layer w3.5: v1(118.11,-157.48) 118.11,-254.14 139.12,-275.15 425.15,-275.15 P6.4
PE9/SPI1_CLK: IC1.40 P6.5 | length 585.6
  Top Layer w3.5: v1(102.36,-232.28) IC1.40
  Bottom Layer w3.5: v1(102.36,-232.28) 102.36,-262.01 131.3,-290.95 395.2,-290.95 439.75,-335.49 439.75,-408.85 466.22,-435.33 467.9,-435.33 482.57,-450 P6.5
PE10/SPI1_MISO: IC1.39 P8.1 | length 755.9
  Top Layer w3.5: IC1.39 v1(86.61,-157.48)
  Bottom Layer w3.5: v1(86.61,-157.48) 86.61,-270.21 123.77,-307.36 387.94,-307.36 423.01,-342.43 423.01,-473.01 467.79,-517.79 P8.1
PE11/I2C0_CLK: IC1.38 JP1.1 | length 1235.6
  Top Layer w3.5: v1(70.87,-232.28) IC1.38 ; v1@230.62,729.72 270.72,729.72 JP1.1
  PWR w3.5: v1(70.87,-232.28) 70.87,-212.2 82.18,-200.89 217.89,-200.89 290.84,-127.94 290.84,669.25 v1(230.37,729.72)
PE12/I2C0_SDA: IC1.37 JP2.1 | length 1147.7
  Top Layer w3.5: IC1.37 v1(55.12,-157.48) ; v1(230.37,670) JP2.1
  PWR w3.5: v1(55.12,-157.48) 55.45,-157.81 55.45,-174.73 66.38,-185.67 197.46,-185.67 274.36,-108.77 274.36,626.01 v1(230.37,670)
SDC0_CLK: IC1.56 TF1.5 | length 655
  Top Layer w3.5: v1(26,473) 26,424.09 TF1.5@27.77,422.32 ; IC1.56 v1(232.28,7.87)
  Bottom Layer w3.5: v1(26,473) 26,454 100.12,379.88 100.12,366.91 97,363.78 97,280 104.2,272.8 104.2,240.01 115.87,228.33 115.87,102.06 210.06,7.87 v1(232.28,7.87)
SDC0_CMD: IC1.55 R4.1 TF1.3 | length 1076.1
  Top Layer w3.5: v1(-59.5,374.2) TF1.3@-59.5,422.32 ; TF1.3 -59.17,498.84 26.99,585 R4.1 ; v1(157.48,-7.87) IC1.55
  Bottom Layer w3.5: v1(-59.5,374.2) 40.35,274.35 40.35,213.22 83.57,170 83.57,66.03 v1(157.48,-7.87)
SDC0_D0: IC1.57 R3.1 TF1.7 | length 815.4
  Top Layer w3.5: v1(81.08,374.54) 81.08,377.53 114.06,410.51 114.06,504.09 159.97,550 R3.1 ; v1(157.48,23.62) IC1.57
  Bottom Layer w3.5: v1(81.08,374.54) 81.08,265.94 91.63,255.39 91.63,230.02 100,221.65 100,81.1 v1(157.48,23.62)
SDC0_D1: IC1.58 R2.1 TF1.8 | length 787.3
  Top Layer w3.5: v1(157.04,374.2) TF1.8@157.03,422.32 ; TF1.8 157.36,507.35 165.01,515 R2.1 ; IC1.58 v1(232.28,39.37)
  PWR w3.5: v1(157.04,374.2) 216.8,374.2 259.63,331.37 259.63,66.72 v1(232.28,39.37)
SDC0_D2: IC1.53 R6.1 TF1.1 | length 1279.9
  Top Layer w3.5: v1(-146.11,374.2) TF1.1@-146.12,422.32 ; TF1.1 -145.79,500.49 -10.19,636.08 319.52,636.08 331.82,648.38 340.67,648.38 R6.1 ; v1(157.48,-39.37) IC1.53
  Bottom Layer w3.5: v1(-146.11,374.2) -144.77,372.86 -144.77,340.21 51.22,144.23 51.22,33 123.59,-39.37 v1@157.44,-39.37
SDC0_D3: IC1.54 R5.1 TF1.2 | length 1262.7
  Top Layer w3.5: v1(-102.47,374.2) TF1.2 -102.48,499.75 17.77,620 R5.1 ; IC1.54 v1(232.28,-23.62)
  Bottom Layer w3.5: v1(-102.47,374.2) -98.63,374.2 -94.56,370.14 -93.58,370.14 -79.72,356.28 -66.28,356.28 23.5,266.5 23.5,201.35 68.85,156 68.85,49.28 141.75,-23.62 v1(232.28,-23.62)
UART0_RX: IC1.49 R22.1 | length 513.8
  Top Layer w3.5: R22.1 41.49,-358.51 70.31,-358.51 v1(71.16,-357.66) ; v1(157.48,-102.36) IC1.49
  Bottom Layer w3.5: v1(71.16,-357.66) -11.14,-275.36 -11.14,-137.81 24.31,-102.36 v1(157.48,-102.36)
UART0_TX: IC1.48 U1.25 | length 722.8
  Top Layer w3.5: v1(93.32,-342.09) 93.32,-367.84 75.7,-385.46 75.7,-500.94 81.33,-506.58 U1.25 ; IC1.48 v1(232.28,-118.11)
  Bottom Layer w3.5: v1(93.32,-342.09) 83.06,-331.83 65.84,-331.83 4.88,-270.87 4.88,-147.22 23.19,-128.92 221.48,-128.92 v1(232.28,-118.11)
USB_CP_N: P10.A7 P10.B7 U1.5 | length 275.1
  Top Layer w3.5: v1(190.47,-749) P10.B7 ; U1.5 229.84,-605.16 P10.A7 229.84,-765.44 v1(236.42,-772.02)
  GND w3.5: v1(190.47,-749) 213.4,-749 v1(236.42,-772.02)
USB_CP_P: P10.A6 P10.B6 U1.4 | length 275.1
  Top Layer w3.5: v1(203.58,-772.02) 210.16,-765.44 P10.A6 210.16,-605.16 U1.4 ; v1(249.53,-749) P10.B6
  PWR w3.5: v1(203.58,-772.02) 226.6,-749 v1(249.53,-749)
USB_ID: IC1.44 P9.A5 R29.2 | length 782.8
  Top Layer w3.5: P9.A5 -269.11,-699.04 -269.11,-651.11 v1(-269,-651) ; v1(31,-440) 31,-467.85 R29.2 ; v1(165.35,-232.28) IC1.44
  PWR w3.5: v1(31,-440) 165.35,-305.65 v1(165.35,-232.28)
  Bottom Layer w3.5: v1(-269,-651) -269,-629 -80,-440 v1(31,-440)
USB_N: IC1.68 P9.A7 P9.B7 | length 1336.4
  Top Layer w3.5: v1(-249.53,-749) P9.B7 ; v1(-203.58,-772.02) -210.16,-765.44 P9.A7 -210.16,-656.9 v1@-202,-648.74 ; IC1.68 149.61,231.29 156.46,238.15 v1(156.46,242)
  GND w3.5: v1(-249.53,-749) -226.6,-749 v1(-203.58,-772.02)
  PWR w3.5: v1(-202,-648) -204.72,-645.28 -210.17,-645.28 -213.25,-642.2 -213.25,-547.34 -3,-337.09 -3,39.91 145.19,188.1 146.43,188.1 148.48,190.15 148.48,232.93 156.46,240.91 v1(156.46,242)
USB_P: IC1.69 P9.A6 P9.B6 | length 1336.4
  Top Layer w3.5: v1(-238,-648) -238,-648.74 -229.84,-656.9 P9.A6 -229.84,-765.44 v1(-236.42,-772.02) ; v1(-190.47,-749) P9.B6 ; v1(127,242) 127,238.15 133.86,231.29 IC1.69
  PWR w3.5: v1(-238,-648) -235.28,-645.28 -229.83,-645.28 -226.75,-642.2 -226.75,-541.75 -16.5,-331.5 -16.5,45.5 134.98,196.98 134.98,232.93 127,240.91 v1(127,242) ; v1(-236.42,-772.02) -213.4,-749 v1(-190.47,-749)
VBUS: D1.1 P9.A4 P9.A9 P9.B4 P9.B9 P10.A4 P10.A9 P10.B4 P10.B9 R29.1 R33.2 TP1.1 U1.7 U1.8 | length 1140
  Top Layer w3.5: U1.8@323.65,-565.63 338.87,-565.63 362.99,-541.51 362.99,-473.75 394.02,-442.72 R33.2
  Top Layer w5: D1.1 -34.29,-560 29.6,-560 TP1.1 35.86,-508.14 R29.1
  Top Layer w10: P9.A4 v1(-320.39,-652) ; P9.B9 -308.58,-735.32 v1(-288.9,-755) ; v1(-138,-774) -138,-771.91 -131.42,-765.33 P9.B4 ; v1(-120.14,-651) -119.87,-651.26 -119.87,-698.89 P9.A9 ; v1(-85,-630) -85,-600.51 -59.49,-575 D1.1 ; v1(-55,-630) -55,-580.71 D1.1 ; v1(-25,-630) -25,-599.29 D1.1 ; P10.A4 v1(119.61,-652) ; P10.B9 131.42,-735.32 v1(151.1,-755) ; U1.7 269.05,-618.78 299.8,-649.52 318.39,-649.52 v1(319.86,-651) ; v1(302,-774) 302,-771.91 308.58,-765.33 P10.B4 ; P10.A9 320.13,-698.89 320.13,-651.26 v1(319.86,-651) ; U1.8@323.65,-565.63 319.86,-569.41 v1(319.86,-651)
VCC_1V2: C1.2 C23.2 C33.2 IC1.22 IC1.35 IC1.71 L3.2 R27.2 TP6.1 | length 1530.3
  Top Layer w3.5: v1(-427.36,-336.62) -427.36,-335.81 -416.55,-325 R27.2 R27.2@-408.03,-332.6 ; IC1.35 v1(23.62,-157.48) ; v1(75.27,242.09) 77.99,244.81 77.99,253.98 93.04,269.03 C1.2@93.97,269.03 ; C1.2@94,269 94,226.36 102.36,218 IC1.71
  Top Layer w8: TP6.1 L3.2 -351.69,-171.97 C33.2@-290.31,-171.97 ; v1(-285,-150) -285,-171.44 -285.53,-171.97 C33.2@-290.31,-171.97 ; IC1.22 -207.55,-165.35 -207.61,-165.42 -207.61,-166.25 -213.34,-171.98 -244.69,-171.98 C23.2 -255.31,-171.97 -279.69,-171.97 C33.2 C33.2@-290.31,-171.97
  GND w3.5: v1(-285,-150) -258,-177 -63,-177 -43.48,-157.48 v1(23.62,-157.48) 23.62,190.44 v1(75.27,242.09)
  PWR w3.5: v1(-427.36,-336.62) -427.36,-187.36 -390,-150 v1(-285,-150)
VCC_2V5: C26.2 C29.1 C31.2 C32.2 IC1.30 IC1.31 IC1.32 IC1.34 IC1.36 L2.2 R20.2 R25.1 TP5.1 | length 1250.3
  Top Layer w3.5: v1(-430,-440) -420,-430 R20.2 R20.2@-408.03,-437.6 ; IC1.30 -55.12,-215.15 v1@-39.37,-230.9 ; IC1.31 v1@-39.37,-230.9 ; IC1.32 -23.62,-215.15 v1@-39.37,-230.9 ; IC1.34 7.87,-223.74 16.42,-232.28 v1(39.37,-232.28) IC1.36
  Top Layer w8: TP5.1 -410,-636.51 -400,-626.51 v1(-400,-605) C26.2 -345.39,-575 L2.2 ; C31.2 C31.2@-106.73,-310 ; v1(-91,-334) -92.86,-332.14 -92.86,-323.87 C31.2@-106.73,-310 ; v1@-39.37,-230.9 v1(-39.37,-232.28) -39.37,-271.06 C29.1 R25.1 C32.2 C31.2@-106.73,-310
  GND w8: v1(-430,-440) -230,-440 -124,-334 v1(-91,-334) ; v1(-39.37,-232.28) v1(39.37,-232.28)
  PWR w3.5: v1(-430,-440) -430,-575 v1(-400,-605)
VCC_3V3: C9.1 C10.2 C12.2 C13.2 C20.2 C21.2 IC1.4 IC1.5 IC1.20 IC1.50 IC1.67 L1.2 M1.4 P7.5 R1.2 R2.2 R3.2 R4.2 R5.2 R6.2 R9.2 R10.1 R11.1 R13.1 R14.1 R17.2 R19.2 R21.1 R24.1 TF1.4 TP4.1 | length 5098.5
  Top Layer w3.5: v1(-232.28,-133.86) IC1.20 ; R17.2 -109.57,-364.4 -101.53,-356.36 -71.36,-356.36 v1(-57,-342) ; R9.2@56.36,318.75 64.4,310.72 R9.2 ; R9.2@65,312 66.88,312 73.64,318.75 73.64,320.64 108,355 v1(135,355) ; R21.1 122.35,-282.65 110.38,-282.65 102.35,-290.69 102.35,-323.35 133,-354 v1(145,-354) ; IC1.50@194.88,-86.41 238.84,-86.41 242.07,-89.64 251.12,-89.64 251.12,-92.27 254.57,-95.72 269.42,-110.58 278.29,-110.58 C20.2 ; v1(247.16,-239.82) 247.16,-272.16 R24.1 R19.2 ; R2.2 R3.2 R4.2 R5.2 R6.2 R14.1 R13.1 R10.1 406.15,760 411.15,765 v1(415,765) ; R11.1 v1(421,865) v1@427,865
  Top Layer w5: v1(-402,-3) -402,63 -366.58,98.42 -366.58,99.12 -355.7,110 -280,110 C13.2 -268,112 -226.41,112 ; IC1.5 -216.77,102.36 -226.41,112 ; IC1.4 -220.3,118.11 -226.41,112 ; R1.2 141.29,316.73 141.29,345.71 135,352.01 v1(135,355) ; IC1.67 165.35,214.83 177.76,227.24 177.76,267.24 C9.1 C10.2 205.5,274.5 236.5,274.5 v1(237,274)
  Top Layer w8: v1(-57,-342) -55.14,-343.86 -55.14,-368.58 C21.2 -49.72,-438.94 L1.2 ; v1(-15.86,374.2) TF1.4
  GND w8: P7.5 -440,-890 -440,-705 -345,-610 -295,-610 -57,-372 v1(-57,-342) -30,-315 107,-315 v1@145,-353 ; v1(247.16,-239.82) 247.16,-166.84 264,-150 264,-109 v1(248,-93)
  PWR w3.5: v1(385,422) 385,744 ; v1(415,765) 413.02,763.02 404.02,763.02 385,744 ; v1(421,865) 401,865 385,849 385,744
  PWR w8: v1(-402,-3) -370.1,-3 -241.1,-132 -234.14,-132 v1(-232.28,-133.86) -232.28,-209.72 -179,-263 -116,-263 -57,-322 v1(-57,-342) ; v1(-15.86,374.2) 9.34,349 67.86,349 73.86,355 v1(135,355) ; v1(145,-354) 162,-354 245.3,-270.7 245.3,-241.68 v1(247.16,-239.82) ; v1(237,274) 237,194 195,152 195,-40 v1(248,-93)
  Bottom Layer w3.5: v1(237,274) v1(385,422)
  Bottom Layer w8: M1.4 -81.84,569.16 -81.84,474.84 v1(-81,474) -15.86,408.86 v1(-15.86,374.2) ; v1(135,355) 171.43,318.57 171.43,308.57 206,274 v1(237,274)
VCC_5V: C14.2 C15.2 C16.1 C24.2 D1.2 IC2.7 IC2.8 IC2.9 IC2.10 IC2.16 IC2.18 IC2.19 IC3.3 M1.2 P2.2 TP2.1 | length 3569.8
  Top Layer w8: C14.2 -279.54,-255.46 -279.54,-272.83 -275,-277.37 v1(-275,-280) -275,-282.63 -270.75,-286.88 IC2.19 ; v1@-273.14,-281.86 -255,-300 IC2.18 ; IC2.7 -270.75,-454.25 -241.83,-483.17 -240.84,-483.17 -240.84,-484.16 C24.2 ; IC2.8 -255,-464.9 -239.25,-480.65 IC2.9 ; C24.2@-232.4,-487.4 -232.4,-472.4 -223.5,-463.5 IC2.10 ; IC2.16 -223.5,-320.06 -223.44,-320 v1(-195,-320) ; v1(-150,-600) -210.71,-600 D1.2 ; v1(-150,-575) D1.2 ; v1(-150,-550) -210.71,-550 D1.2 ; v1(345,140) 343.14,141.86 343.14,155.87 322.72,176.3 C15.2 C16.1 360,236 389,265 IC3.3 392,292 v1(415,315)
  Top Layer w20: C24.2 -235,-575 D1.2
  GND w8: v1(-135,695) -35,795 v1(425,795) ; v1(275,-350) 345,-280 v1(345,140)
  PWR w8: v1(-275,-280) -255.31,-299.69 -255.31,-340.31 ; v1(-252.88,-471.47) -254.74,-469.61 -254.74,-462.74 -255.31,-462.17 -255.31,-340.31 ; v1(-195,-320) -235,-320 -255.31,-340.31 ; v1(-150,-575) 50,-575 v1(275,-350) ; v1(415,315) 415,710 440,735 440,790 ; v1(425,795) 426.86,793.14 436.86,793.14 440,790 ; P2.2 440,790
  Bottom Layer w8: M1.2 -136.4,571.4 -136.4,693.6 v1(-135,695)
pads on no net: IC1.1 IC1.72 IC1.75 IC1.76 IC1.77 IC1.78 IC1.84 IC1.85 IC1.86 IC1.87 IC1.88 M1.1 M1.13 P9.0 P9.A8 P9.B8 P10.0 P10.A8 P10.B8 TF1.14 TF1.15 U1.1 U1.2 U1.6 U1.10 U1.11 U1.12 U1.13 U1.14 U1.15 U1.16 U1.17 U1.18 U1.19 U1.20 U1.21 U1.22 U1.23 U1.24 U1.27 U1.28

## Polygon pours and split planes (outlines as drawn)
GND on GND "NONET_L01_P-001" (solid, pour order 3): 547.44,1000 547.44,-1000 -547.44,-1000 -547.44,1000
GND on PWR "NONET_L01_P-001" (solid, pour order 4): 547.44,1000 547.44,-1000 -547.44,-1000 -547.44,1000
VBUS on PWR "NONET_L01_P-001" (solid, pour order 1): -125,-615 -190,-680 -255,-680 -300,-635 -340,-635 -340,-770 -285,-770 -275,-760 -275,-740 -255,-720 95,-720 145,-770 160,-770 170,-760 170,-735 185,-720 275,-720 290,-735 290,-785 335,-785 335,-615 -80,-615
GND on Top Layer "NONET_L01_P-001" (hatched 45Degree grid 20 track 8, pour order 2): 547.44,1000 547.44,-1000 -547.44,-1000 -547.44,1000
GND on Bottom Layer "NONET_L01_P-001" (hatched 45Degree grid 20 track 8, pour order 5): 547.44,1000 547.44,-1000 -547.44,-1000 -547.44,1000

## Silkscreen, mask and mechanical layers (free items; w line width, h text height)
Mechanical 1:
  the board outline again, w5